# Altium PCB Air_PCB.PcbDoc
Units mil, origin at the board's own origin, x right, y up, seen from the top; angles counter-clockwise.
Board outline 880 x 740 mil, 2 copper layers (Top Layer, Bottom Layer 1), stack 7.356 mil thick; 11 components, 8 nets, 39 pads, 8 vias.
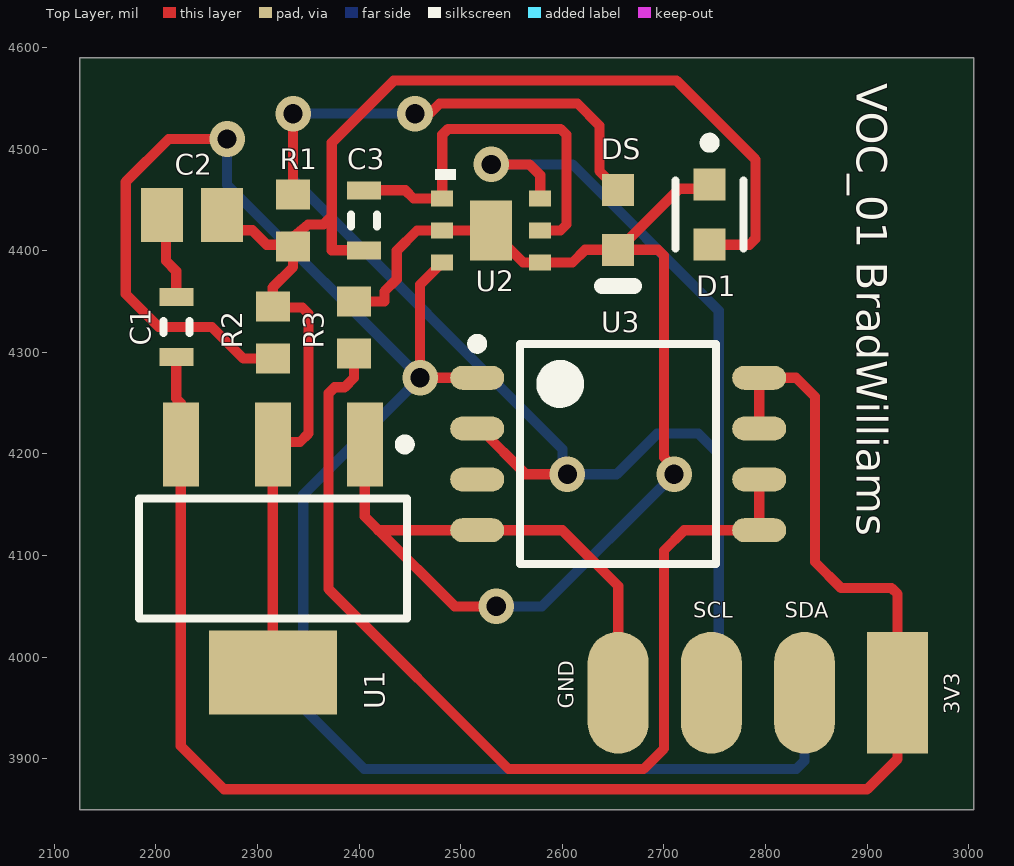
[diagram p0: Top Layer view]
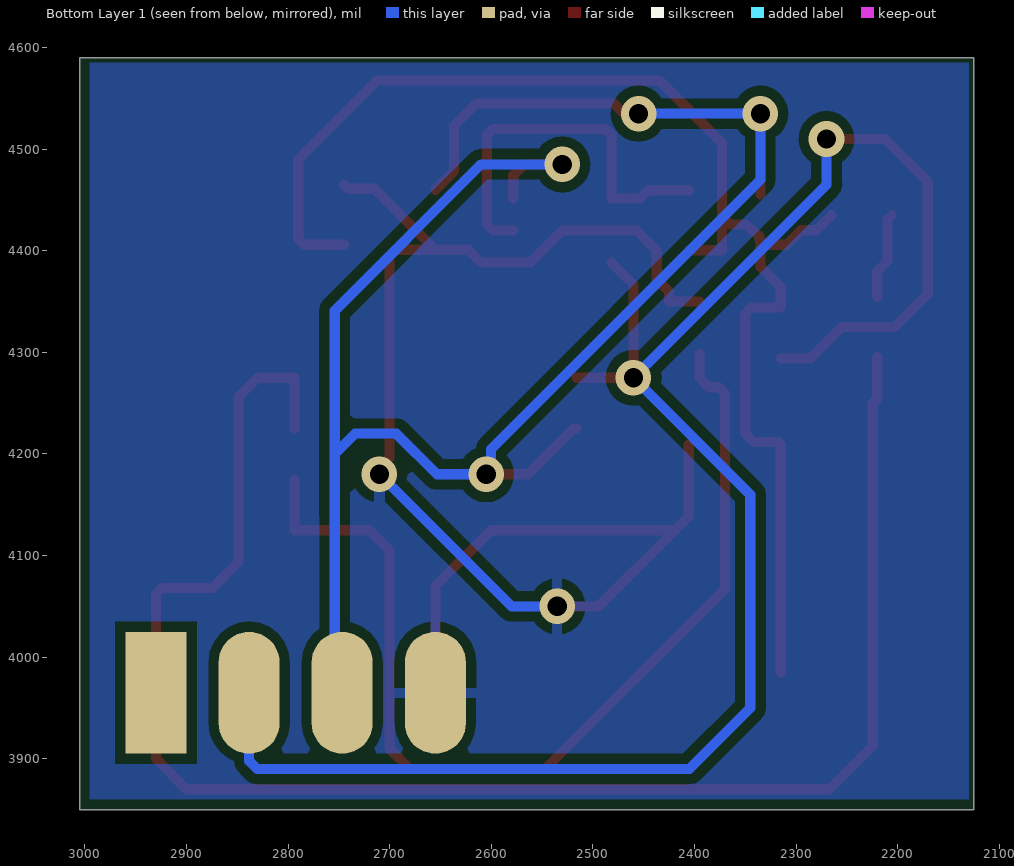
[diagram p1: Bottom Layer 1 view, seen from below]

## Layer stack, top to bottom
Top Solder: solder mask 0.4, Solder Resist, Dk 3.5
Top Layer: signal copper 1.378
Dielectric 1: prepreg 4.6, PP-016, Dk 4.4
Bottom Layer 1: signal copper 1.378
Bottom Solder: solder mask 0.4, Solder Resist, Dk 3.5

## Board outline
2125,3850 3005,3850 3005,4590 2125,4590

## Design rules (kind name [scope] priority, off if disabled: settings)
Clearance Clearance_5 [All] p1: gap=10 ignorepadtopadclearanceinfootprint=FALSE except(0: Arc-Hole Track-Hole SMDPad-Hole THPad-Hole Via-Hole Fill-Hole Poly-Hole Region-Hole Text-Hole)
Clearance Clearance_4 [All] p2 off: gap=10 ignorepadtopadclearanceinfootprint=FALSE except(0: Arc-Hole Track-Hole SMDPad-Hole THPad-Hole Via-Hole Fill-Hole Poly-Hole Region-Hole Text-Hole)
Clearance Clearance_3 [All] p3 off: gap=10 ignorepadtopadclearanceinfootprint=FALSE except(0: Arc-Hole Track-Hole SMDPad-Hole THPad-Hole Via-Hole Fill-Hole Poly-Hole Region-Hole Text-Hole)
Clearance [All] p4 off: gap=10 ignorepadtopadclearanceinfootprint=FALSE except(0: Arc-Hole Track-Hole SMDPad-Hole THPad-Hole Via-Hole Fill-Hole Poly-Hole Region-Hole Text-Hole)
Clearance Clearance_2 [All] p5 off: gap=10 ignorepadtopadclearanceinfootprint=FALSE except(0: Arc-Hole Track-Hole SMDPad-Hole THPad-Hole Via-Hole Fill-Hole Poly-Hole Region-Hole Text-Hole; 8: Arc-Arc Arc-Track Track-Track)
Clearance Clearance_1 [All] p6 off: gap=10 ignorepadtopadclearanceinfootprint=FALSE except(0: Arc-Hole Track-Hole SMDPad-Hole THPad-Hole Via-Hole Fill-Hole Poly-Hole Region-Hole Text-Hole)
ComponentClearance [All] p1 off: gap=10 collisioncheckmode=3 verticalgap=10 showdistances=FALSE
PolygonConnect [All] p1: connectstyle=Relief reliefconductorwidth=10 reliefentries=4 polygonreliefangle="90 Angle" airgapwidth=10
RoutingVias [All] p1: holewidth=28 width=50 viastyle="Through Hole" minholewidth=8 minwidth=20 maxholewidth=28 maxwidth=50
SolderMaskExpansion [All] p1: expansion=4 istentingtop=FALSE
Width [All] p1: maxlimit=10 minlimit=10 preferedwidth=10
29 further rules are at their usual default settings.

## Classes and differential pairs
component class Air_SCH: C1 C2 C3 D1 DS R1 R2 R3 U1 U3

## Components (designator, comment, footprint, x,y, rotation, side; value= is the part's Value field where it differs from the comment)
C1 "CGA3E2X7R1H104K080AA" CAPC1608X90X20LL10 2220,4325 r270 top
C2 "GCM21BR70J106KE22L" CAPC2013X140X45LL15T25 2235.47,4435 r0 top
C3 "CGA3E2X7R1H104K080AA" CAPC1608X90X20LL10 2405,4430 r270 top
D1 "LTST-C190GKT" FP-LTST-C190GKT-MFG 2745,4435.47 r270 top
DS "HSMY-C190" AVAG-HSMX-C190_V 2655,4430.48 r270 top
R1 "ERJ3EKF1002V" RESC1609X55X30LL15T15 2335,4430 r270 top
R2 "ERJ3EKF1002V" RESC1609X55X30LL15T15 2315,4319.41 r270 top
R3 "ERJ3EKF1002V" RESC1609X55X30LL15T15 2395,4324.41 r90 top
U1 "LD1117AS18TR" SOT-223_L 2315,4097.2 r270 top
U2 "" SGP30 2530,4420 r0 top (schematic designator U$2)
U3 "DS1621V+" MAXM-W8+2_L 2655,4200 r0 top

## Footprints (in the part's own frame and the unit in brackets; to place one, negate y for a bottom-side part, rotate by r counter-clockwise, add the part's x,y. Pads: shape width x height; smd on the part's side, far side on the other; paste and mask are expansions set on the pad)
AVAG-HSMX-C190_V [mm] "SMD, 2-Leads, Body 1.6x0.8mm, Height 0.9mm"
  rect 0.8x0.8 smd: 1(-0.75,0) 2(0.75,0)
  silkscreen extent 1.65,-0.4 1.65,0.4, body extent -0.8,-0.4 0.8,0.4, height 0.9
CAPC1608X90X20LL10 [mm] "Chip Capacitor, 2-Leads, Body 1.70x0.90mm, IPC High Density"
  rect 0.45x0.85 smd: 1(-0.75,0) 2(0.75,0)
  silkscreen extent -0.15,-0.33 0.15,0.33, body extent -0.85,-0.45 0.85,0.45, height 0.9
CAPC2013X140X45LL15T25 [mm] "Chip Capacitor, 2-Leads, Body 2.00x1.25mm, IPC High Density"
  rect 1.05x1.35 smd: 1(-0.75,0) 2(0.75,0)
  body extent -1.08,-0.7 1.07,0.7, height 1.4
FP-LTST-C190GKT-MFG [mm]
  rect 0.8x0.8 smd paste+0 mask+0: 1(-0.75,0) 2(0.75,0)
  silkscreen extent -1.92,-0.85 0.85,0.85, body extent -1.25,-0.55 1.25,0.55, height 0.25
MAXM-W8+2_L [mm] "SOIC, 8-Leads, Body 5.31x5.285mm, Pitch 1.27mm, IPC High Density"
  oval 1.35x0.6 smd: 1(-3.525,1.905) 2(-3.525,0.635) 3(-3.525,-0.635) 4(-3.525,-1.905) 5(3.525,-1.905) 6(3.525,-0.635) 7(3.525,0.635) 8(3.525,1.905)
  silkscreen extent -3.65,-2.75 2.45,2.88, body extent -2.7,-2.75 2.7,2.75, height 2.13
RESC1609X55X30LL15T15 [mm] "Chip Resistor, 2-Leads, Body 1.75x0.95mm, IPC High Density"
  rect 0.75x0.85 smd: 1(-0.65,0) 2(0.65,0)
  body extent -0.87,-0.48 0.87,0.48, height 0.55
SGP30 [mil] "SGP30"
  rect 21.65x15.75 smd: 1(-48.23,31.5) 2(-48.23,0) 3(-48.23,-31.5) 4(48.23,-31.5) 5(48.23,0) 6(48.23,31.5)
  rect 41.34x59.06 smd: P$7(0,0)
  body extent -59,-39 59,39, height 50
SOT-223_L [mm] "SOT223, 4-Leads, Body 6.5x3.5mm, Pitch 2.3mm, Lead Span 7mm, IPC High Density"
  rect 2.1x0.9 smd: 1(-2.85,2.3) 2(-2.85,0) 3(-2.85,-2.3)
  rect 2.1x3.2 smd: 4(2.85,0)
  silkscreen extent -2.97,-3.35 1.5,3.43, body extent -1.85,-3.35 1.85,3.35, height 1.8

## Part data
C1 C3: library part CMP-2000-07546-1, "Chip Capacitor, 0.1 uF, +/- 10%, 50 V, -55 to 125 degC, 0603 (1608 Metric), RoHS, Tape and Reel", Capacitance=100nF, Case Code (Imperial)=0603, Case Code (Metric)=1608, Dielectric=X7R, Manufacturer=TDK, Max Operating Temperature=125degC, Min Operating Temperature=-55degC, Package Description="2-Pin Surface Mount Device, Body 1.6 x 0.8 mm", Package Quantity=1, Package Reference=603, Tolerance=10%, Voltage=50V, Case/Package=0603, Composition=Ceramic, Datasheet URL=https://product.tdk.com/info/en/catalog/datasheets/mlcc_automotive_general_en.pdf, Datasheet Version=12/2014, Depth=0.8mm, Height=0.8mm, Lead Free=LeadFree, Length=1.6mm, Manufacturer URL=http://www.tdk.com/, Mount=SurfaceMount, Mounting Technology=SurfaceMount, Packaging=TapeandReel, Radiation Hardening=No, REACH SVHC=NoSVHC, RoHSCompliant=True, Termination=SMD/SMT, Thickness=0.035inch, Voltage Rating=50V, Voltage Rating (DC)=50V, Weight=7.1E-05oz, Width=0.8mm
C2: library part CMP-2007-03335-1, Manufacturer=Murata, Part Number=GCM21BR70J106KE22L
D1: library part CMP-22017-000018-1, "LED GREEN CLEAR CHIP SMD", Case Code (Imperial)=0603, Case Code (Metric)=1608, Color=Green, Forward Current=30mA, Forward Voltage=2.1V, Lens Color=Colorless, Max Operating Temperature=85°C, Min Operating Temperature=-55°C, Package Quantity=1, Power Dissipation=100mW, Reverse Voltage=5V, Test Current=10mA, Voltage=2V, Case/Package=0603, Depth=0.8mm, Dominant Wavelength=569nm, Height=0.8mm, Illumination Color=Green, Lead Free="Lead Free", Length=1.6mm, Lens Style=Clear, Lens Transparency=Clear, Luminous Intensity=6mcd, Mount="Surface Mount", Number of Elements=1, Number of LEDs=1, Number of Pins=2, Packaging="Tape and Reel", Power Rating=100mW, Radiation Hardening=No, Viewing Angle=130°, Wavelength=565nm, Width=0.8mm
DS: library part CMP-1744-00003-1, "LED Uni-Color Yellow, 65 mW, 20 mA, -40 to 85 degC, 2-Pin SMD, RoHS, Tape and Reel", Case Code (Imperial)=0603, Case Code (Metric)=1608, Max Operating Temperature="155 degC", Min Operating Temperature="-55 degC", Package Quantity=5000, Power Rating="100 mW", Resistance="390 Ohm", Tolerance=1%, Voltage Rating="50 V", Case\Package=0603, ComponentLink1Description="Manufacturer URL", ComponentLink1URL=http://www.avagotech.com/, ComponentLink2Description=Datasheet, ComponentLink2URL=http://docs.avagotech.com/docs/AV02-0551EN, ComponentLink3Description="Package Specification", ComponentLink3URL=http://www.fairchildsemi.com/dwg/MA/MA03D.pdf, DatasheetVersion=Mar-12, Height="0.45 mm", Length="1.6 mm", Mount="Surface Mount", PackageDescription="2-Pin Surface Mount Device, Body 1.6 x 0.8 mm, Height 0.9 mm", PackageReference=HSMX-C190, Packaging="Tape and Reel", Pins=2, REACH SVHC="No SVHC", RoHSCompliant=true, Voltage Rating (DC)="50 V", Width="0.8 mm"
R1 R2 R3: library part CMP-2000-07452-1, "Chip Resistor, 10 KOhm, +/- 1%, 0.1 W, -55 to 155 degC, 0603 (1608 Metric), RoHS, Tape and Reel", Case Code (Imperial)=0603, Case Code (Metric)=1608, Manufacturer=Panasonic, Max Operating Temperature=155degC, Max Power Dissipation=100mW, Min Operating Temperature=-55degC, Package Description="2-Pin Surface Mount Device, Body 1.6 x 0.85 mm", Package Quantity=1, Package Reference=603, Resistance=10KOhm, Temperature Coefficient=100ppm\/degreesC, Tolerance=1%, Voltage Rating=75V, Case\/Package=0603, Composition=ThickFilm, Contact Plating=Tin, Datasheet URL=https://industrial.panasonic.com/cdbs/www-data/pdf/RDA0000/AOA0000C304.pdf, Datasheet Version=02/2017, Depth=0.8mm, Height=0.45mm, Lead Free=LeadFree, Length=1.6mm, Manufacturer URL=http://www.panasonic.com/, Military Standard=Not, Mount=SurfaceMount, Mounting Technology=SurfaceMount, Number of Pins=2, Number of Terminations=2, Packaging=TapeandReel, Power Rating=100mW, Radiation Hardening=No, REACH SVHC=NoSVHC, RoHSCompliant=true, Termination=SMD/SMT, Voltage Rating (DC)=75V, Width=0.031inch
U1: library part CMP-0244-00319-1, "1A, Low Drop Positive Voltage Regulator, 1.8V, 4-Pin SOT-223, Tape and Reel", ComponentLink1Description="Manufacturer URL", ComponentLink1URL=http://www.st.com, ComponentLink2Description=Datasheet, ComponentLink2URL=http://www.st.com/internet/com/TECHNICAL_RESOURCES/TECHNICAL_LITERATURE/DATASHEET/CD00002116.pdf, DatasheetVersion=2/12/2011, PackageDescription="4-Pin SOT-223 Package, 6.5 x 3.5 mm Body, 2.3 mm Pitch, 7 mm Lead Span", PackageReference=SOT-223, PackageVersion=2010
U2: library part SGP30, PackageName=SGP30
U3: library part CMP-0253-01131-1, "2-wire 0.5 degC Accurate Temperature Sensor and Thermostat, 9 to 12 Bits Temperature Resolution, -55 to 125 degC, 8-Pin SOIC (W8+2), Pb-Free", Generic Part Number=DS1621, ComponentLink1Description="Manufacturer URL", ComponentLink1URL=http://www.maximintegrated.com/, ComponentLink2Description=Datasheet, ComponentLink2URL=http://datasheets.maximintegrated.com/en/ds/DS1621.pdf, ComponentLink3Description="Package Specification", ComponentLink3URL=http://pdfserv.maximintegrated.com/package_dwgs/21-0262.PDF, DatasheetVersion="Rev. 3", Functions="Single Temperature Alarm", Interface=2-Wire/I2C/SMBus, Mounting Technology="Surface Mount", Multi Droppable=Yes, PackageDescription="8-Pin Small-Outline IC, Body 5.285 x 5.31 mm, Pitch 1.27 mm", PackageReference=W8+2, PackageVersion="Rev. B, 01/2010", Parasite Pwr.=No, PartNumber=DS1621V+

## Free pads (board coordinates)
  oval 60x120 all layers, no hole: 1(2655,3965) 2(2746.67,3965) 3(2838.33,3965)
  rect 60x120 all layers, no hole: 4(2930,3965)

## Via types
v1: diameter 35, hole 19, Top Layer to Bottom Layer 1, 8 vias

## Nets (pads, with @x,y where several pads share a name; then routed paths per layer and width w, separated by ;. In a path a pad name is that pad's centre, name@x,y a point inside that pad or via, vN(x,y) a via of type N, cw(c..) or ccw(c..) an arc to the next point about the centre after c; other vN are vias at no path point)
1V8: C2.2 C3.2 D1.2 R1.2 R2.1 U1.2 U1.4 | length 1362.8
  Top Layer w10: C2.2 2279.81,4420.19 2294.81,4420.19 2309.13,4405.87 2333.54,4405.87 R1.2 ; U1.4 U1.2 2317.45,4211.86 2341.86,4211.86 2350,4220 2350,4338.27 2344.14,4344.13 2315.87,4344.13 R2.1 2315,4364 2335,4384 R1.2 ; 2373,4434.17 2364.65,4425.83 2349.86,4425.83 2347.11,4423.59 2336.06,4414.61 2335.63,4410.49 R1.2 ; C3.2 2373,4400.47 2373,4434.61 2373,4506.43 2434.07,4567.5 2712.5,4567.5 2790,4490 2790,4411.8 2784.14,4405.94 D1.2
3V3: C1.2 pad.4 U1.3 U3.7 U3.8 | length 1652.1
  Top Layer w10: C1.2 2220,4254.45 2224.45,4250 U1.3 2224.45,3912.55 2267,3870 2900,3870 2930,3900 pad.4 2930,4062.14 2924.14,4068 2874.5,4068 2848.75,4093.75 2848.75,4256.25 2830,4275 U3.8 U3.7
GND: D1.1 DS.2 pad.1 R3.2 U1.1 U2.2 U2.4 U2.P$7 U3.4 | length 1544.6
  Top Layer w10: R3.2 2425,4350 2425,4360.01 2437,4372.01 2437,4400 2457,4420 U2.2 U2.P$7 2561.5,4388.5 U2.4 2610,4388.5 2622.44,4400.94 2655.94,4400.94 DS.2@2655.94,4401.89 ; U1.1 2405.55,4138.45 2418.81,4125.19 2494,4050 v1(2535,4050) ; 2418.62,4125 U3.4 2600,4125 2655,4070 pad.1 ; v1(2710,4180) 2710,4186.76 2700,4196.76 2700,4395.09 2694.14,4400.94 DS.2 2665.75,4411.69 2715.16,4461.11 2741.11,4461.11 D1.1
  Bottom Layer 1 w10: v1(2535,4050) 2580,4050 v1(2710,4180)
NetC1_1: C1.1 C2.1 | length 86.3
  Top Layer w10: C2.1 2210,4430.94 2210,4390 2220,4380 C1.1
NetC3_1: C3.1 U2.1 U2.5 | length 386.4
  Top Layer w10: C3.1 2445.47,4459.53 2453.5,4451.5 U2.1 2481.77,4514.14 2487.63,4520 2598.2,4520 2604.05,4514.14 2604.05,4425.86 2598.2,4420 U2.5
NetR3_1: R3.1 U3.5 U3.6 | length 1006.6
  Top Layer w10: R3.1 2394.91,4298.73 2394.91,4274.91 2385.75,4265.75 2375.86,4265.75 2370,4259.89 2370,4067 2547,3890 2680,3890 2700,3910 2700,4105 2720,4125 U3.5 U3.6
SCL: DS.1 pad.2 R1.1 U2.6 U3.2 | length 1955.6
  Top Layer w10: R1.1 v1(2335,4535) ; v1(2455,4535) 2469.27,4535 2479.27,4545 2614.85,4545 2636.47,4523.38 2636.47,4478.53 DS.1 ; U3.2 2518.9,4225 2563.9,4180 v1(2605,4180) ; v1(2530,4485) 2567.59,4485 2578.23,4474.36 U2.6
  Bottom Layer 1 w10: v1(2455,4535) v1(2335,4535) 2335,4470 2600.22,4204.78 2600.22,4184.78 v1(2605,4180) 2653.43,4180 2693.43,4220 2734,4220 2754,4200 ; v1(2530,4485) 2610,4485 2754,4341 2754,4200 ; pad.2 2746.67,3995 2754,3995 2754,4200
SDA: pad.3 R2.2 U2.3 U3.1 | length 1852.2
  Top Layer w10: v1(2270,4510) 2212.49,4510 2170.27,4467.79 2170.27,4357.45 2202.72,4325 2255,4325 2286.18,4293.82 R2.2 ; U2.3 2467.5,4374.23 2460,4366.73 v1(2460,4275) U3.1
  Bottom Layer 1 w10: v1(2270,4510) 2270,4465 v1(2460,4275) 2345,4160 2345,3950 2405,3890 2830.33,3890 2838.33,3898 pad.3
pads on no net: U3.3

## Polygon pours and split planes (outlines as drawn)
GND on Bottom Layer 1 "GND_L02_P001" (solid, pour order 1): 2130,4585 2995,4585 2995,3860 2130,3860
GND on Bottom Layer 1 "GND_L02_P000" (solid, pour order 0): 2230,4485 2425,4290 2425,4260 2330,4160 2330,3940 2395,3875 2845,3875 2885,3915 2885,4030 2770,4145 2770,4345 2620,4495 2620,4500 2550,4500 2490,4570 2315,4570 2295,4560 2260,4550 2230,4520
no net on Bottom Layer 1 "NONET_L02_P003" (solid, pour order 3): 2560,4545
no net on Bottom Layer 1 "NONET_L02_P002" (solid, pour order 2): 2100,4575

## Silkscreen, mask and mechanical layers (free items; w line width, h text height)
Top Overlay:
  region: 2495,4470 2475,4470 2475,4480 2495,4480
  text "VOC_01 BradWilliams" at 2890,4565 h30 r270
  text "SCL" at 2729,4039 h15
  text "SDA" at 2819,4039 h15
  text "GND" at 2611,3949 h15 r90
  text "3V3" at 2991,3944 h15 r90